# Altium PCB Port Deployable Solar Panel.PcbDoc (part 2 of 2)
Units mm, origin at the board's own origin, x right, y up, seen from the top; angles counter-clockwise.
Board outline 327.5 x 81 mm, 2 copper layers (Top Layer, Bottom Layer), stack 1.58 mm thick; 55 components, 32 nets, 178 pads, 1922 vias.
Unrouted connection lines stored in the file: 43.
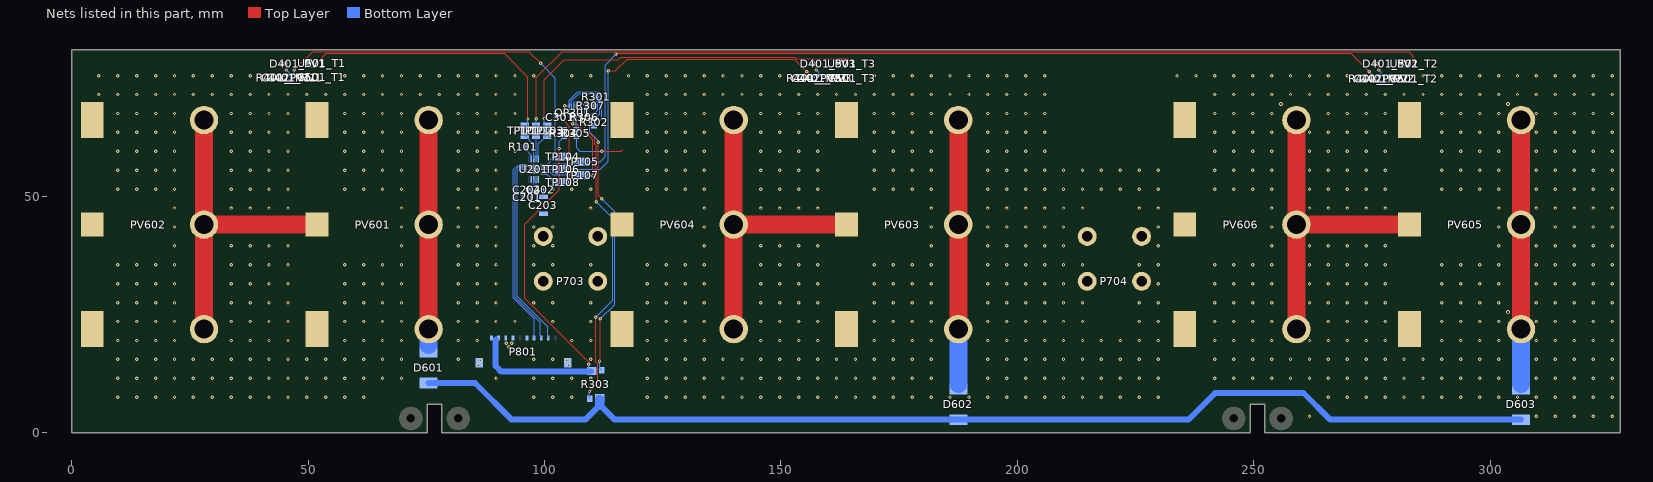
[diagram p2: the nets of this part, all layers, seen from the top]

## Via types
v1: diameter 0.711, hole 0.3, Top Layer to Bottom Layer, tented both sides, 1015 vias
v2: diameter 0.8, hole 0.5, Top Layer to Bottom Layer, 858 vias
v3: diameter 0.655, hole 0.25, Top Layer to Bottom Layer, 48 vias
v4: diameter 0.711, hole 0.3, Top Layer to Bottom Layer, 1 vias

## Nets (pads, with @x,y where several pads share a name; then routed paths per layer and width w, separated by ;. In a path a pad name is that pad's centre, name@x,y a point inside that pad or via, vN(x,y) a via of type N, cw(c..) or ccw(c..) an arc to the next point about the centre after c; other vN are vias at no path point) (continued)
GND: C201.1 C202.2 C203.2 C204.2 C301.1 C402_PV1.1 C402_PV2.1 C402_PV3.1 C501_T1.1 C501_T2.1 C501_T3.1 OP301.4 P703.1 P704.1 P801.5 P801.M1 P801.M2 pad.3 R307.2 R401_PV1.1 R401_PV2.1 R401_PV3.1 U201.6 U201.9 U201.21 U501_T1.A1 U501_T2.A1 U501_T3.A1
  other v1: 261.75,3.5 309.75,3.5 313.75,3.5 317.75,3.5 321.75,3.5 325.75,3.5 9.75,7.5 13.75,7.5 17.75,7.5 21.75,7.5 25.75,7.5 29.75,7.5 33.75,7.5 37.75,7.5 41.75,7.5 45.75,7.5 49.75,7.5 53.75,7.5 57.75,7.5 61.75,7.5 97.75,7.5 101.75,7.5 105.75,7.5 121.75,7.5 125.75,7.5 129.75,7.5 133.75,7.5 137.75,7.5 141.75,7.5 145.75,7.5 149.75,7.5 153.75,7.5 157.75,7.5 161.75,7.5 165.75,7.5 169.75,7.5 173.75,7.5 177.75,7.5 181.75,7.5 185.75,7.5 189.75,7.5 193.75,7.5 197.75,7.5 201.75,7.5 205.75,7.5 209.75,7.5 213.75,7.5 217.75,7.5 221.75,7.5 225.75,7.5 229.75,7.5 265.75,7.5 269.75,7.5 273.75,7.5 277.75,7.5 281.75,7.5 285.75,7.5 289.75,7.5 293.75,7.5 297.75,7.5 301.75,7.5 305.75,7.5 309.75,7.5 313.75,7.5 317.75,7.5 321.75,7.5 325.75,7.5 9.75,11.5 13.75,11.5 17.75,11.5 21.75,11.5 25.75,11.5 29.75,11.5 33.75,11.5 37.75,11.5 41.75,11.5 45.75,11.5 49.75,11.5 53.75,11.5 57.75,11.5 61.75,11.5 65.75,11.5 69.75,11.5 89.75,11.5 97.75,11.5 101.75,11.5 105.75,11.5 109.75,11.5 121.75,11.5 125.75,11.5 129.75,11.5 133.75,11.5 137.75,11.5 141.75,11.5 145.75,11.5 149.75,11.5 153.75,11.5 157.75,11.5 161.75,11.5 165.75,11.5 169.75,11.5 173.75,11.5 177.75,11.5 181.75,11.5 193.75,11.5 197.75,11.5 201.75,11.5 205.75,11.5 209.75,11.5 213.75,11.5 217.75,11.5 221.75,11.5 225.75,11.5 229.75,11.5 241.75,11.5 245.75,11.5 249.75,11.5 253.75,11.5 257.75,11.5 261.75,11.5 265.75,11.5 269.75,11.5 273.75,11.5 277.75,11.5 281.75,11.5 285.75,11.5 289.75,11.5 293.75,11.5 297.75,11.5 301.75,11.5 309.75,11.5 313.75,11.5 317.75,11.5 321.75,11.5 325.75,11.5 9.75,15.5 13.75,15.5 17.75,15.5 21.75,15.5 25.75,15.5 29.75,15.5 33.75,15.5 37.75,15.5 41.75,15.5 45.75,15.5 49.75,15.5 53.75,15.5 57.75,15.5 61.75,15.5 65.75,15.5 69.75,15.5 81.75,15.5 97.75,15.5 101.75,15.5 109.75,15.5 121.75,15.5 125.75,15.5 129.75,15.5 133.75,15.5 137.75,15.5 141.75,15.5 145.75,15.5 149.75,15.5 153.75,15.5 157.75,15.5 161.75,15.5 165.75,15.5 169.75,15.5 173.75,15.5 177.75,15.5 181.75,15.5 193.75,15.5 197.75,15.5 201.75,15.5 205.75,15.5 209.75,15.5 213.75,15.5 217.75,15.5 221.75,15.5 225.75,15.5 229.75,15.5 241.75,15.5 245.75,15.5 249.75,15.5 253.75,15.5 257.75,15.5 261.75,15.5 265.75,15.5 269.75,15.5 273.75,15.5 277.75,15.5 281.75,15.5 285.75,15.5 289.75,15.5 293.75,15.5 297.75,15.5 301.75,15.5 309.75,15.5 313.75,15.5 317.75,15.5 321.75,15.5 325.75,15.5 9.75,19.5 13.75,19.5 17.75,19.5 21.75,19.5 33.75,19.5 37.75,19.5 41.75,19.5 45.75,19.5 57.75,19.5 61.75,19.5 65.75,19.5 69.75,19.5 81.75,19.5 85.75,19.5 105.75,19.5 109.75,19.5 121.75,19.5 125.75,19.5 129.75,19.5 133.75,19.5 145.75,19.5 149.75,19.5 153.75,19.5 157.75,19.5 169.75,19.5 173.75,19.5 177.75,19.5 181.75,19.5 193.75,19.5 197.75,19.5 201.75,19.5 205.75,19.5 209.75,19.5 213.75,19.5 217.75,19.5 221.75,19.5 225.75,19.5 229.75,19.5 241.75,19.5 245.75,19.5 249.75,19.5 253.75,19.5 261.75,19.5 265.75,19.5 269.75,19.5 273.75,19.5 277.75,19.5 289.75,19.5 293.75,19.5 297.75,19.5 301.75,19.5 309.75,19.5 313.75,19.5 317.75,19.5 321.75,19.5 325.75,19.5 9.75,23.5 13.75,23.5 17.75,23.5 21.75,23.5 33.75,23.5 37.75,23.5 41.75,23.5 45.75,23.5 57.75,23.5 61.75,23.5 65.75,23.5 69.75,23.5 81.75,23.5 85.75,23.5 89.75,23.5 93.75,23.5 101.75,23.5 109.75,23.5 121.75,23.5 125.75,23.5 129.75,23.5 133.75,23.5 145.75,23.5 149.75,23.5 153.75,23.5 157.75,23.5 169.75,23.5 173.75,23.5 177.75,23.5 181.75,23.5 193.75,23.5 197.75,23.5 201.75,23.5 205.75,23.5 209.75,23.5 213.75,23.5 225.75,23.5 229.75,23.5 241.75,23.5 245.75,23.5 249.75,23.5 253.75,23.5 265.75,23.5 269.75,23.5 273.75,23.5 277.75,23.5 289.75,23.5 293.75,23.5 297.75,23.5 301.75,23.5 309.75,23.5 313.75,23.5 317.75,23.5 321.75,23.5 325.75,23.5 9.75,27.5 13.75,27.5 17.75,27.5 21.75,27.5 33.75,27.5 37.75,27.5 41.75,27.5 45.75,27.5 57.75,27.5 61.75,27.5 65.75,27.5 69.75,27.5 81.75,27.5 85.75,27.5 89.75,27.5 97.75,27.5 101.75,27.5 109.75,27.5 121.75,27.5 125.75,27.5 129.75,27.5 133.75,27.5 145.75,27.5 149.75,27.5 153.75,27.5 157.75,27.5 169.75,27.5 173.75,27.5 177.75,27.5 181.75,27.5 193.75,27.5 197.75,27.5 201.75,27.5 205.75,27.5 209.75,27.5 213.75,27.5 225.75,27.5 229.75,27.5 241.75,27.5 245.75,27.5 249.75,27.5 253.75,27.5 261.75,27.5 265.75,27.5 269.75,27.5 273.75,27.5 277.75,27.5 289.75,27.5 293.75,27.5 297.75,27.5 301.75,27.5 309.75,27.5 313.75,27.5 317.75,27.5 321.75,27.5 325.75,27.5 9.75,31.5 13.75,31.5 17.75,31.5 21.75,31.5 33.75,31.5 37.75,31.5 41.75,31.5 45.75,31.5 57.75,31.5 61.75,31.5 65.75,31.5 69.75,31.5 81.75,31.5 85.75,31.5 89.75,31.5 121.75,31.5 125.75,31.5 129.75,31.5 133.75,31.5 145.75,31.5 149.75,31.5 153.75,31.5 157.75,31.5 169.75,31.5 173.75,31.5 177.75,31.5 181.75,31.5 193.75,31.5 197.75,31.5 201.75,31.5 205.75,31.5 209.75,31.5 229.75,31.5 241.75,31.5 245.75,31.5 249.75,31.5 253.75,31.5 261.75,31.5 265.75,31.5 269.75,31.5 273.75,31.5 277.75,31.5 289.75,31.5 293.75,31.5 297.75,31.5 301.75,31.5 309.75,31.5 313.75,31.5 317.75,31.5 321.75,31.5 325.75,31.5 9.75,35.5 13.75,35.5 17.75,35.5 21.75,35.5 33.75,35.5 37.75,35.5 41.75,35.5 45.75,35.5 57.75,35.5 61.75,35.5 65.75,35.5 69.75,35.5 81.75,35.5 85.75,35.5 89.75,35.5 97.75,35.5 101.75,35.5 109.75,35.5 121.75,35.5 125.75,35.5 129.75,35.5 133.75,35.5 145.75,35.5 149.75,35.5 153.75,35.5 157.75,35.5 169.75,35.5 173.75,35.5 177.75,35.5 181.75,35.5 193.75,35.5 197.75,35.5 201.75,35.5 205.75,35.5 209.75,35.5 213.75,35.5 225.75,35.5 229.75,35.5 241.75,35.5 245.75,35.5 249.75,35.5 253.75,35.5 261.75,35.5 265.75,35.5 269.75,35.5 273.75,35.5 277.75,35.5 289.75,35.5 293.75,35.5 297.75,35.5 301.75,35.5 309.75,35.5 313.75,35.5 317.75,35.5 321.75,35.5 325.75,35.5 21.75,39.5 33.75,39.5 37.75,39.5 41.75,39.5 45.75,39.5 69.75,39.5 81.75,39.5 85.75,39.5 89.75,39.5 97.75,39.5 101.75,39.5 133.75,39.5 145.75,39.5 149.75,39.5 153.75,39.5 157.75,39.5 181.75,39.5 193.75,39.5 197.75,39.5 201.75,39.5 205.75,39.5 209.75,39.5 229.75,39.5 253.75,39.5 261.75,39.5 265.75,39.5 269.75,39.5 273.75,39.5 277.75,39.5 301.75,39.5 309.75,39.5 313.75,39.5 317.75,39.5 321.75,39.5 325.75,39.5 21.75,43.5 69.75,43.5 81.75,43.5 85.75,43.5 89.75,43.5 97.75,43.5 101.75,43.5 133.75,43.5 181.75,43.5 193.75,43.5 197.75,43.5 201.75,43.5 205.75,43.5 209.75,43.5 229.75,43.5 253.75,43.5 301.75,43.5 313.75,43.5 317.75,43.5 321.75,43.5 325.75,43.5 21.75,47.5 33.75,47.5 37.75,47.5 41.75,47.5 45.75,47.5 69.75,47.5 81.75,47.5 85.75,47.5 89.75,47.5 97.75,47.5 101.75,47.5 109.75,47.5 133.75,47.5 145.75,47.5 149.75,47.5 153.75,47.5 157.75,47.5 181.75,47.5 193.75,47.5 197.75,47.5 201.75,47.5 205.75,47.5 209.75,47.5 213.75,47.5 225.75,47.5 229.75,47.5 253.75,47.5 261.75,47.5 265.75,47.5 269.75,47.5 273.75,47.5 277.75,47.5 301.75,47.5 309.75,47.5 313.75,47.5 317.75,47.5 321.75,47.5 325.75,47.5 9.75,51.5 13.75,51.5 17.75,51.5 21.75,51.5 33.75,51.5 37.75,51.5 41.75,51.5 45.75,51.5 57.75,51.5 61.75,51.5 65.75,51.5 69.75,51.5 81.75,51.5 85.75,51.5 89.75,51.5 101.75,51.5 105.75,51.5 109.75,51.5 121.75,51.5 125.75,51.5 129.75,51.5 133.75,51.5 145.75,51.5 149.75,51.5 153.75,51.5 157.75,51.5 169.75,51.5 173.75,51.5 177.75,51.5 181.75,51.5 193.75,51.5 197.75,51.5 201.75,51.5 205.75,51.5 209.75,51.5 213.75,51.5 217.75,51.5 221.75,51.5 225.75,51.5 229.75,51.5 241.75,51.5 245.75,51.5 249.75,51.5 253.75,51.5 261.75,51.5 265.75,51.5 269.75,51.5 273.75,51.5 277.75,51.5 289.75,51.5 293.75,51.5 297.75,51.5 301.75,51.5 309.75,51.5 313.75,51.5 317.75,51.5 321.75,51.5 325.75,51.5 97.15,55.15 98.25,55.15 9.75,55.5 13.75,55.5 17.75,55.5 21.75,55.5 33.75,55.5 37.75,55.5 41.75,55.5 45.75,55.5 57.75,55.5 61.75,55.5 65.75,55.5 69.75,55.5 81.75,55.5 85.75,55.5 89.75,55.5 121.75,55.5 125.75,55.5 129.75,55.5 133.75,55.5 145.75,55.5 149.75,55.5 153.75,55.5 157.75,55.5 169.75,55.5 173.75,55.5 177.75,55.5 181.75,55.5 193.75,55.5 197.75,55.5 201.75,55.5 205.75,55.5 209.75,55.5 213.75,55.5 217.75,55.5 221.75,55.5 225.75,55.5 229.75,55.5 241.75,55.5 245.75,55.5 249.75,55.5 253.75,55.5 261.75,55.5 265.75,55.5 269.75,55.5 273.75,55.5 277.75,55.5 289.75,55.5 293.75,55.5 297.75,55.5 301.75,55.5 309.75,55.5 313.75,55.5 317.75,55.5 321.75,55.5 325.75,55.5 97.15,56.25 98.25,56.25 9.75,59.5 13.75,59.5 17.75,59.5 21.75,59.5 33.75,59.5 37.75,59.5 41.75,59.5 45.75,59.5 57.75,59.5 61.75,59.5 65.75,59.5 69.75,59.5 81.75,59.5 85.75,59.5 89.75,59.5 93.75,59.5 121.75,59.5 125.75,59.5 129.75,59.5 133.75,59.5 145.75,59.5 149.75,59.5 153.75,59.5 157.75,59.5 169.75,59.5 173.75,59.5 177.75,59.5 181.75,59.5 193.75,59.5 197.75,59.5 201.75,59.5 205.75,59.5 241.75,59.5 245.75,59.5 249.75,59.5 253.75,59.5 261.75,59.5 265.75,59.5 269.75,59.5 273.75,59.5 277.75,59.5 289.75,59.5 293.75,59.5 297.75,59.5 301.75,59.5 309.75,59.5 313.75,59.5 317.75,59.5 321.75,59.5 325.75,59.5 9.75,63.5 13.75,63.5 17.75,63.5 21.75,63.5 33.75,63.5 37.75,63.5 41.75,63.5 45.75,63.5 57.75,63.5 61.75,63.5 65.75,63.5 69.75,63.5 81.75,63.5 85.75,63.5 89.75,63.5 93.75,63.5 121.75,63.5 125.75,63.5 129.75,63.5 133.75,63.5 145.75,63.5 149.75,63.5 153.75,63.5 157.75,63.5 169.75,63.5 173.75,63.5 177.75,63.5 181.75,63.5 193.75,63.5 197.75,63.5 201.75,63.5 205.75,63.5 241.75,63.5 245.75,63.5 249.75,63.5 253.75,63.5 261.75,63.5 265.75,63.5 269.75,63.5 273.75,63.5 277.75,63.5 289.75,63.5 293.75,63.5 297.75,63.5 301.75,63.5 309.75,63.5 313.75,63.5 317.75,63.5 321.75,63.5 325.75,63.5 9.75,67.5 13.75,67.5 17.75,67.5 21.75,67.5 33.75,67.5 37.75,67.5 41.75,67.5 45.75,67.5 57.75,67.5 61.75,67.5 65.75,67.5 69.75,67.5 81.75,67.5 85.75,67.5 89.75,67.5 93.75,67.5 121.75,67.5 125.75,67.5 129.75,67.5 133.75,67.5 145.75,67.5 149.75,67.5 153.75,67.5 157.75,67.5 169.75,67.5 173.75,67.5 177.75,67.5 181.75,67.5 193.75,67.5 197.75,67.5 201.75,67.5 205.75,67.5 241.75,67.5 245.75,67.5 249.75,67.5 253.75,67.5 265.75,67.5 269.75,67.5 273.75,67.5 277.75,67.5 289.75,67.5 293.75,67.5 297.75,67.5 301.75,67.5 309.75,67.5 313.75,67.5 317.75,67.5 321.75,67.5 325.75,67.5 5.75,71.5 9.75,71.5 13.75,71.5 17.75,71.5 21.75,71.5 25.75,71.5 29.75,71.5 33.75,71.5 37.75,71.5 41.75,71.5 45.75,71.5 49.75,71.5 53.75,71.5 57.75,71.5 61.75,71.5 65.75,71.5 69.75,71.5 73.75,71.5 77.75,71.5 81.75,71.5 85.75,71.5 89.75,71.5 93.75,71.5 121.75,71.5 125.75,71.5 129.75,71.5 133.75,71.5 137.75,71.5 141.75,71.5 145.75,71.5 149.75,71.5 153.75,71.5 157.75,71.5 161.75,71.5 165.75,71.5 169.75,71.5 173.75,71.5 177.75,71.5 181.75,71.5 185.75,71.5 189.75,71.5 193.75,71.5 197.75,71.5 201.75,71.5 205.75,71.5 241.75,71.5 245.75,71.5 249.75,71.5 253.75,71.5 257.75,71.5 261.75,71.5 265.75,71.5 269.75,71.5 273.75,71.5 277.75,71.5 281.75,71.5 285.75,71.5 289.75,71.5 293.75,71.5 297.75,71.5 301.75,71.5 305.75,71.5 309.75,71.5 313.75,71.5 317.75,71.5 321.75,71.5 325.75,71.5 5.75,75.5 9.75,75.5 13.75,75.5 17.75,75.5 21.75,75.5 25.75,75.5 29.75,75.5 33.75,75.5 37.75,75.5 41.75,75.5 49.75,75.5 57.75,75.5 61.75,75.5 65.75,75.5 69.75,75.5 73.75,75.5 77.75,75.5 81.75,75.5 85.75,75.5 89.75,75.5 93.75,75.5 97.75,75.5 105.75,75.5 109.75,75.5 117.75,75.5 121.75,75.5 125.75,75.5 129.75,75.5 133.75,75.5 137.75,75.5 141.75,75.5 145.75,75.5 149.75,75.5 153.75,75.5 161.75,75.5 169.75,75.5 173.75,75.5 177.75,75.5 181.75,75.5 185.75,75.5 189.75,75.5 193.75,75.5 197.75,75.5 201.75,75.5 205.75,75.5 233.75,75.5 237.75,75.5 241.75,75.5 245.75,75.5 249.75,75.5 253.75,75.5 257.75,75.5 261.75,75.5 265.75,75.5 269.75,75.5 281.75,75.5 285.75,75.5 289.75,75.5 293.75,75.5 297.75,75.5 301.75,75.5 305.75,75.5 309.75,75.5 313.75,75.5 317.75,75.5 321.75,75.5 325.75,75.5
  other v2: 303.75,25.5 255.75,69.5 303.75,69.5
NetC201_2: C201.2 U201.8 | length 4
  Bottom Layer w0.254: C201.2@97.2,49.75 97.2,49.95 97.7,50.45 U201.8@97.7,53.5
NetC202_1: C202.1 C203.1 U201.7 | length 4.6
  Bottom Layer w0.254: U201.7@98.2,53.5 98.2,51.9 98.6,51.5 C202.1@98.6,51.4 98.6,51.3 98.927,50.973 98.927,50.198 99.275,49.85 C203.1@99.75,49.85
NetD601_1: D601.1 PV601.1 | length 47.6
  Top Layer w3.81: PV601.1@75.5,22.139 75.5,40 75.5,62.111 PV601.1@75.5,66.361
  Bottom Layer w3.81: 75.5,18.5 PV601.1@75.5,21.889
NetD602_1: D602.1 PV603.1 | length 55.9
  Top Layer w3.81: PV603.1@187.5,22.139 PV603.1@187.5,66.111 PV603.1@187.5,66.361
  Bottom Layer w3.81: D602.1@187.5,10.25 PV603.1@187.5,21.889
NetD603_1: D603.1 PV605.1 | length 55.9
  Top Layer w3.81: PV605.1@306.5,22.139 PV605.1@306.5,44 PV605.1@306.5,66.111 PV605.1@306.5,66.361
  Bottom Layer w3.81: D603.1@306.5,10.25 PV605.1@306.5,21.889
NetOP301_2: OP301.2 R301.2 R302.1 | length 13.3
  Bottom Layer w0.254: OP301.2@105.7,68.945 105.702,68.947 105.702,70.196 107.206,71.7 110.818,71.7 111.203,71.315 111.203,71.123 R301.2@111.326,71 ; R302.1@110.476,66.35 110.601,66.35 111.686,67.435 111.686,70.112 111.28,70.518 111.28,70.954 R301.2@111.326,71 ; R301.2@111.35,71 R301.2@111.326,71
NetOP301_3: OP301.3 R306.2 R307.1 | length 5.7
  Bottom Layer w0.254: OP301.3@106.2,68.945 106.202,68.947 106.202,69.803 106.399,70 107.675,70 108.55,69.125 108.55,68.9 R306.2@108.55,67.026
NetOP301_5: OP301.5 R304.2 R305.2 | length 2.4
  Bottom Layer w0.254: R305.2@106.7,64.1 OP301.5@106.7,66.455
NetPV601_2: PV601.2 PV602.1 | length 68.1
  Top Layer w3.81: PV602.1@28,21.889 PV602.1@28,44 ; PV602.1@28,66.111 PV602.1@28,44 ; PV601.2@51.878,44 PV602.1@28,44
NetPV603_2: PV603.2 PV604.1 | length 112.3
  Top Layer w3.81: PV604.1@140,21.889 PV604.1@140,44 ; PV604.1@140,22.139 140,44.25 PV604.1@140,66.361 ; PV604.1@140,66.111 PV604.1@140,44 ; PV603.2@163.878,44 PV604.1@140,44
NetPV605_2: PV605.2 PV606.1 | length 68.1
  Top Layer w3.81: PV606.1@259,21.889 PV606.1@259,44 ; PV606.1@259,66.111 PV606.1@259,44 ; PV605.2@282.878,44 PV606.1@259,44
NetR101_1: R101.1 U201.17 | length 3
  Bottom Layer w0.254: R101.1@96.198,60.5 96.198,59.697 96.715,59.18 97.177,58.718 97.177,57.923 U201.17@97.2,57.9
NetR301_1: R301.1 R303.3 | length 62.7
  Top Layer w0.254: v1(111.35,61.4) 111.35,50.22 v1(112.07,49.5) ; v1(111.627,15.1) 111.8,15.273 v1(111.8,24.1)
  Bottom Layer w0.254: R301.1@110.598,71 110.623,71 110.746,70.877 110.746,70.373 111.279,69.839 111.279,68.295 110.684,67.7 110.215,67.7 109.571,67.056 109.571,63.529 111.35,61.75 v1(111.35,61.4) ; v1(111.627,15.1) 111.627,13.642 R303.3@112.07,13.199 ; v1(111.8,24.1) 114.8,27.1 114.8,46.77 v1(112.07,49.5)
NetR303_4: R303.4 R306.1 | length 63.9
  Top Layer w0.254: v1(108.55,65.1) 108.55,64.3 110.606,62.244 110.606,60.987 110.944,60.65 v1(110.944,48.8) ; v1(109.5,8.7) 111.3,10.5 111.3,14.529 110.8,15.029 v1(110.8,24.4)
  Bottom Layer w0.254: v1(108.55,65.1) R306.1@108.55,66.274 ; v1(109.5,8.7) 109.5,7.231 R303.4@109.53,7.201 ; v1(110.8,24.4) 114.394,27.994 114.394,45.35 v1(110.944,48.8)
NetU201_12: U201.12
SPI_CLK: P801.4 U201.15 | length 40
  Bottom Layer w0.254: U201.15@95.5,56.7 95.498,56.698 94.498,56.698 93.381,55.581 93.381,28.52 97.8,24.101 P801.4@97.8,20
SPI_MISO: P801.3 U201.14 | length 39.7
  Bottom Layer w0.254: U201.14@95.5,56.2 95.498,56.198 94.573,56.198 93.787,55.412 93.787,28.688 99.127,23.348 99.127,20.373 99.3,20.2 P801.3@99.3,20
SPI_MOSI: P801.2 U201.13 | length 39.4
  Bottom Layer w0.254: U201.13@95.5,55.7 95.498,55.698 94.698,55.698 94.194,55.194 94.194,28.856 100.65,22.4 100.65,20.15 P801.2@100.8,20
V+: D601.2 D602.2 D603.2 R303.1 | length 244.6
  Bottom Layer w1.27: D601.2@75.5,10.5 85.3,10.5 93.05,2.75 108.6,2.75 111.265,5.415 111.265,7.155 111.455,7.345 R303.1@111.635,7.345 111.815,7.345 112.005,7.155 112.005,5.595 114.85,2.75 D602.2@187.5,2.75 236.18,2.75 241.83,8.4 260.5,8.4 266.15,2.75 D603.2@306.5,2.75
V-: P801.7 P801.8 PV602.2 PV604.2 PV606.2 R305.1 | length 12.6
  Top Layer w0.254: v1(112.07,59.55) 116.2,59.55 116.55,59.9
  Bottom Layer w0.254: R305.1@106.7,62.6 106.85,62.45 106.85,60.2 107.5,59.55 v1(112.07,59.55)
  other v1: 92.45,18.15 91.9,18.9 93.05,18.9
V_out: P801.9 P801.10 R303.2 R304.1 | length 85.3
  Top Layer w0.254: v1(103.1,60.1) 103.1,51.35 95.825,44.075 95.825,28.425 109.35,14.9 v1(109.35,14.45)
  Bottom Layer w0.254: v1(103.1,60.1) 103.1,61.6 103.602,62.102 103.602,62.227 103.975,62.6 R304.1@104.1,62.6 ; v1(109.35,14.45) 109.35,13.36 R303.2@109.81,12.9
  Bottom Layer w1.27: 89.7,19.7 89.65,19.65 89.65,14.1 90.85,12.9 R303.2@109.81,12.9
VIN0: TP101.1 U201.18 U501_T1.B1 | length 65.3
  Top Layer w0.203: U501_T1.B1@52.7,78.35 52.7,79.094 53.819,80.213 91.5,80.213 96.5,75.213 v1(96.5,66.326)
  Bottom Layer w0.254: TP101.1@95.775,62.854 97.7,60.929 U201.18@97.7,57.9 ; TP101.1@95.8,63 TP101.1@95.8,63.826 96.5,64.526 v1(96.5,66.326)
VIN1: TP102.1 U201.19 U501_T2.B1 | length 205.5
  Top Layer w0.203: v1(98.25,66.376) 98.25,75.113 103.737,80.6 115.075,80.6 ; 115.076,80.6 115.698,80.6 282.8,80.6 283.75,79.65 U501_T2.B1@283.75,78.25
  Bottom Layer w0.254: U201.19@98.2,57.9 TP102.1@98.2,62.5 ; TP102.1@98.2,63.826 98.25,63.876 v1(98.25,66.376)
VIN2: TP103.1 U201.20 U501_T3.B1 | length 85
  Top Layer w0.203: v1(99.9,66.426) 99.9,74.6 104.15,78.85 115.6,78.85 116.1,79.35 152.939,79.35 153.189,79.1 162.016,79.1 162.07,79.154 163.73,79.154 163.784,79.1 164.4,79.1 164.4,78.65 U501_T3.B1@164.8,78.25
  Bottom Layer w0.203: v1(99.9,66.426) 99.9,64.525 TP103.1@100.6,63.826
  Bottom Layer w0.254: U201.20@98.7,57.9 98.7,61.052 99.838,62.19 99.838,62.212 100.29,62.664 TP103.1@100.312,62.664 ; TP103.1@100.6,63 TP103.1@100.6,63.826
VIN3: C401_PV1.1 C402_PV1.2 D401_PV1.1 R401_PV1.2 TP104.1 U201.1 | length 87.5
  Top Layer w0.254: D401_PV1.1@44.9,78 45.027,78 45.4,77.627 v1(45.4,76.7) ; v1(47.1,76.7) 50.994,80.594 96.706,80.594 v1(99.2,78.1)
  Bottom Layer w0.254: R401_PV1.2@44.85,75.326 44.962,75.438 45.888,75.438 C402_PV1.2@46,75.55 ; v1(45.4,76.7) 45.921,76.179 45.921,75.629 C402_PV1.2@46,75.55 ; v1(47.1,76.7) 47.125,76.675 47.125,75.575 47.15,75.55 C402_PV1.2@46,75.55 ; v1(99.2,78.1) 102.312,74.988 102.312,59.162 TP104.1@103.074,58.4 ; U201.1@99.9,56.7 100.521,56.7 101.164,57.343 101.164,57.759 101.804,58.4 TP104.1@103.074,58.4 ; TP104.1@103.9,58.4 TP104.1@103.074,58.4
VIN4: C401_PV2.1 C402_PV2.2 D401_PV2.1 R401_PV2.2 TP105.1 U201.2 | length 204.8
  Top Layer w0.254: v1(115.1,79.991) 115.1,80 115.319,80.219 270.481,80.219 v1(274.4,76.3) ; D401_PV2.1@275.95,78 276.027,78 276.4,77.627 v1(276.4,76.7)
  Bottom Layer w0.254: U201.2@99.9,56.2 101.2,56.2 101.868,56.868 107.468,56.868 TP105.1@107.9,57.3 111.75,57.3 112.815,58.365 112.815,77.715 115.091,79.991 v1(115.1,79.991) ; v1(274.4,76.3) 275.319,75.381 275.845,75.381 275.95,75.276 276.062,75.388 276.988,75.388 C402_PV2.2@277.1,75.5 ; v1(276.4,76.7) 276.921,76.179 276.921,75.633 277.054,75.5 C402_PV2.2@277.1,75.5 ; C401_PV2.1@278.25,75.5 C402_PV2.2@277.1,75.5
VIN5: C401_PV3.1 C402_PV3.2 D401_PV3.1 R401_PV3.2 TP106.1 U201.3 | length 85.2
  Top Layer w0.254: v1(113.45,76.5) 115,76.5 117.469,78.969 152.781,78.969 v1(155.45,76.3) ; D401_PV3.1@157,78 157.077,78 157.45,77.627 v1(157.45,76.7)
  Bottom Layer w0.254: U201.3@99.9,55.7 TP106.1@103.9,55.7 111.75,55.7 113.45,57.4 v1(113.45,76.5) v1@113.221,76.271 ; v1(155.45,76.3) 156.369,75.381 156.895,75.381 R401_PV3.2@157,75.276 157.112,75.388 158.038,75.388 C402_PV3.2@158.15,75.5 ; v1(157.45,76.7) 157.971,76.179 157.971,75.633 158.104,75.5 C402_PV3.2@158.15,75.5 ; C401_PV3.1@159.3,75.5 C402_PV3.2@158.15,75.5
VIN6: OP301.6 OP301.7 TP107.1 U201.4 | length 23.9
  Top Layer w0.254: v1(105.95,65.3) 106.85,65.3 110.2,61.95 v1(110.2,54.35)
  Bottom Layer w0.254: U201.4@99.9,55.2 101.101,55.2 101.77,54.532 107.768,54.532 TP107.1@107.9,54.4 107.95,54.35 v1(110.2,54.35)
VIN7: OP301.1 R302.2 TP108.1 U201.5 | length 38.6
  Top Layer w0.254: v1(104.25,69.1) 104.25,65.7 105.25,64.7 v1(105.25,53.25)
  Bottom Layer w0.254: U201.5@99.9,54.7 100.521,54.7 101.164,54.057 101.164,53.641 101.804,53 TP108.1@103.9,53 ; v1(104.25,69.1) 105.198,69.1 OP301.1@105.2,69.098 ; OP301.1@105.2,68.945 105.202,68.947 105.202,69.1 105.202,70.303 107.006,72.106 111.163,72.106 112.092,71.177 112.092,66.341 110.601,64.85 R302.2@110.476,64.85
pads on no net: OP301.9 P701.1 P702.1
copper on no net:
  other v1: 109.3,70.8
  other v2: 7.75,13.5 11.75,13.5 15.75,13.5 19.75,13.5 23.75,13.5 27.75,13.5 31.75,13.5 35.75,13.5 39.75,13.5 55.75,13.5 59.75,13.5 63.75,13.5 67.75,13.5 71.75,13.5 75.75,13.5 79.75,13.5 83.75,13.5 87.75,13.5 119.75,13.5 123.75,13.5 127.75,13.5 131.75,13.5 135.75,13.5 139.75,13.5 143.75,13.5 147.75,13.5 151.75,13.5 167.75,13.5 171.75,13.5 175.75,13.5 179.75,13.5 183.75,13.5 191.75,13.5 195.75,13.5 199.75,13.5 239.75,13.5 243.75,13.5 247.75,13.5 251.75,13.5 255.75,13.5 259.75,13.5 263.75,13.5 267.75,13.5 271.75,13.5 287.75,13.5 291.75,13.5 295.75,13.5 299.75,13.5 303.75,13.5 311.75,13.5 315.75,13.5 319.75,13.5 7.75,17.5 11.75,17.5 15.75,17.5 19.75,17.5 23.75,17.5 27.75,17.5 31.75,17.5 35.75,17.5 39.75,17.5 43.75,17.5 55.75,17.5 59.75,17.5 63.75,17.5 67.75,17.5 71.75,17.5 79.75,17.5 83.75,17.5 87.75,17.5 119.75,17.5 123.75,17.5 127.75,17.5 131.75,17.5 135.75,17.5 139.75,17.5 143.75,17.5 147.75,17.5 151.75,17.5 155.75,17.5 167.75,17.5 171.75,17.5 175.75,17.5 179.75,17.5 183.75,17.5 191.75,17.5 195.75,17.5 199.75,17.5 203.75,17.5 239.75,17.5 243.75,17.5 247.75,17.5 251.75,17.5 255.75,17.5 259.75,17.5 263.75,17.5 267.75,17.5 271.75,17.5 275.75,17.5 287.75,17.5 291.75,17.5 295.75,17.5 299.75,17.5 303.75,17.5 311.75,17.5 315.75,17.5 319.75,17.5 323.75,17.5 7.75,21.5 11.75,21.5 15.75,21.5 19.75,21.5 23.75,21.5 31.75,21.5 35.75,21.5 39.75,21.5 43.75,21.5 47.75,21.5 55.75,21.5 59.75,21.5 63.75,21.5 67.75,21.5 71.75,21.5 79.75,21.5 83.75,21.5 87.75,21.5 91.75,21.5 119.75,21.5 123.75,21.5 127.75,21.5 131.75,21.5 135.75,21.5 143.75,21.5 147.75,21.5 151.75,21.5 155.75,21.5 159.75,21.5 167.75,21.5 171.75,21.5 175.75,21.5 179.75,21.5 183.75,21.5 191.75,21.5 195.75,21.5 199.75,21.5 203.75,21.5 239.75,21.5 243.75,21.5 247.75,21.5 251.75,21.5 263.75,21.5 267.75,21.5 271.75,21.5 275.75,21.5 287.75,21.5 291.75,21.5 295.75,21.5 299.75,21.5 311.75,21.5 315.75,21.5 319.75,21.5 323.75,21.5 7.75,25.5 11.75,25.5 15.75,25.5 19.75,25.5 23.75,25.5 31.75,25.5 35.75,25.5 39.75,25.5 43.75,25.5 47.75,25.5 55.75,25.5 59.75,25.5 63.75,25.5 67.75,25.5 71.75,25.5 79.75,25.5 83.75,25.5 87.75,25.5 91.75,25.5 119.75,25.5 123.75,25.5 127.75,25.5 131.75,25.5 135.75,25.5 143.75,25.5 147.75,25.5 151.75,25.5 155.75,25.5 159.75,25.5 167.75,25.5 171.75,25.5 175.75,25.5 179.75,25.5 183.75,25.5 191.75,25.5 195.75,25.5 199.75,25.5 203.75,25.5 239.75,25.5 243.75,25.5 247.75,25.5 251.75,25.5 263.75,25.5 267.75,25.5 271.75,25.5 275.75,25.5 287.75,25.5 291.75,25.5 295.75,25.5 299.75,25.5 311.75,25.5 315.75,25.5 319.75,25.5 323.75,25.5 7.75,29.5 11.75,29.5 15.75,29.5 19.75,29.5 23.75,29.5 31.75,29.5 35.75,29.5 39.75,29.5 43.75,29.5 47.75,29.5 55.75,29.5 59.75,29.5 63.75,29.5 67.75,29.5 71.75,29.5 79.75,29.5 83.75,29.5 87.75,29.5 91.75,29.5 119.75,29.5 123.75,29.5 127.75,29.5 131.75,29.5 135.75,29.5 143.75,29.5 147.75,29.5 151.75,29.5 155.75,29.5 159.75,29.5 167.75,29.5 171.75,29.5 175.75,29.5 179.75,29.5 183.75,29.5 191.75,29.5 195.75,29.5 199.75,29.5 203.75,29.5 239.75,29.5 243.75,29.5 247.75,29.5 251.75,29.5 255.75,29.5 263.75,29.5 267.75,29.5 271.75,29.5 275.75,29.5 287.75,29.5 291.75,29.5 295.75,29.5 299.75,29.5 303.75,29.5 311.75,29.5 315.75,29.5 319.75,29.5 323.75,29.5 7.75,33.5 11.75,33.5 15.75,33.5 19.75,33.5 23.75,33.5 31.75,33.5 35.75,33.5 39.75,33.5 43.75,33.5 47.75,33.5 55.75,33.5 59.75,33.5 63.75,33.5 67.75,33.5 71.75,33.5 79.75,33.5 83.75,33.5 87.75,33.5 91.75,33.5 119.75,33.5 123.75,33.5 127.75,33.5 131.75,33.5 135.75,33.5 143.75,33.5 147.75,33.5 151.75,33.5 155.75,33.5 159.75,33.5 167.75,33.5 171.75,33.5 175.75,33.5 179.75,33.5 183.75,33.5 191.75,33.5 195.75,33.5 199.75,33.5 203.75,33.5 239.75,33.5 243.75,33.5 247.75,33.5 251.75,33.5 255.75,33.5 263.75,33.5 267.75,33.5 271.75,33.5 275.75,33.5 287.75,33.5 291.75,33.5 295.75,33.5 299.75,33.5 303.75,33.5 311.75,33.5 315.75,33.5 319.75,33.5 323.75,33.5 7.75,37.5 11.75,37.5 15.75,37.5 19.75,37.5 23.75,37.5 31.75,37.5 35.75,37.5 39.75,37.5 43.75,37.5 47.75,37.5 55.75,37.5 59.75,37.5 63.75,37.5 67.75,37.5 71.75,37.5 79.75,37.5 83.75,37.5 87.75,37.5 91.75,37.5 119.75,37.5 123.75,37.5 127.75,37.5 131.75,37.5 135.75,37.5 143.75,37.5 147.75,37.5 151.75,37.5 155.75,37.5 159.75,37.5 167.75,37.5 171.75,37.5 175.75,37.5 179.75,37.5 183.75,37.5 191.75,37.5 195.75,37.5 199.75,37.5 203.75,37.5 239.75,37.5 243.75,37.5 247.75,37.5 251.75,37.5 255.75,37.5 263.75,37.5 267.75,37.5 271.75,37.5 275.75,37.5 287.75,37.5 291.75,37.5 295.75,37.5 299.75,37.5 303.75,37.5 311.75,37.5 315.75,37.5 319.75,37.5 323.75,37.5 23.75,41.5 31.75,41.5 35.75,41.5 39.75,41.5 43.75,41.5 71.75,41.5 79.75,41.5 83.75,41.5 87.75,41.5 91.75,41.5 135.75,41.5 143.75,41.5 147.75,41.5 151.75,41.5 155.75,41.5 183.75,41.5 191.75,41.5 195.75,41.5 199.75,41.5 203.75,41.5 251.75,41.5 255.75,41.5 263.75,41.5 267.75,41.5 271.75,41.5 275.75,41.5 299.75,41.5 311.75,41.5 315.75,41.5 319.75,41.5 323.75,41.5 23.75,45.5 71.75,45.5 79.75,45.5 83.75,45.5 87.75,45.5 91.75,45.5 135.75,45.5 183.75,45.5 191.75,45.5 195.75,45.5 199.75,45.5 203.75,45.5 251.75,45.5 299.75,45.5 311.75,45.5 315.75,45.5 319.75,45.5 323.75,45.5 23.75,49.5 31.75,49.5 35.75,49.5 39.75,49.5 43.75,49.5 47.75,49.5 71.75,49.5 79.75,49.5 83.75,49.5 87.75,49.5 91.75,49.5 135.75,49.5 143.75,49.5 147.75,49.5 151.75,49.5 155.75,49.5 159.75,49.5 183.75,49.5 191.75,49.5 195.75,49.5 199.75,49.5 203.75,49.5 251.75,49.5 255.75,49.5 263.75,49.5 267.75,49.5 271.75,49.5 275.75,49.5 299.75,49.5 303.75,49.5 311.75,49.5 315.75,49.5 319.75,49.5 323.75,49.5 7.75,53.5 11.75,53.5 15.75,53.5 19.75,53.5 23.75,53.5 31.75,53.5 35.75,53.5 39.75,53.5 43.75,53.5 47.75,53.5 55.75,53.5 59.75,53.5 63.75,53.5 67.75,53.5 71.75,53.5 79.75,53.5 83.75,53.5 87.75,53.5 91.75,53.5 119.75,53.5 123.75,53.5 127.75,53.5 131.75,53.5 135.75,53.5 143.75,53.5 147.75,53.5 151.75,53.5 155.75,53.5 159.75,53.5 167.75,53.5 171.75,53.5 175.75,53.5 179.75,53.5 183.75,53.5 191.75,53.5 195.75,53.5 199.75,53.5 203.75,53.5 239.75,53.5 243.75,53.5 247.75,53.5 251.75,53.5 255.75,53.5 263.75,53.5 267.75,53.5 271.75,53.5 275.75,53.5 287.75,53.5 291.75,53.5 295.75,53.5 299.75,53.5 303.75,53.5 311.75,53.5 315.75,53.5 319.75,53.5 323.75,53.5 7.75,57.5 11.75,57.5 15.75,57.5 19.75,57.5 23.75,57.5 31.75,57.5 35.75,57.5 39.75,57.5 43.75,57.5 47.75,57.5 55.75,57.5 59.75,57.5 63.75,57.5 67.75,57.5 71.75,57.5 79.75,57.5 83.75,57.5 87.75,57.5 91.75,57.5 119.75,57.5 123.75,57.5 127.75,57.5 131.75,57.5 135.75,57.5 143.75,57.5 147.75,57.5 151.75,57.5 155.75,57.5 159.75,57.5 167.75,57.5 171.75,57.5 175.75,57.5 179.75,57.5 183.75,57.5 191.75,57.5 195.75,57.5 199.75,57.5 203.75,57.5 239.75,57.5 243.75,57.5 247.75,57.5 251.75,57.5 255.75,57.5 263.75,57.5 267.75,57.5 271.75,57.5 275.75,57.5 287.75,57.5 291.75,57.5 295.75,57.5 299.75,57.5 303.75,57.5 311.75,57.5 315.75,57.5 319.75,57.5 323.75,57.5 7.75,61.5 11.75,61.5 15.75,61.5 19.75,61.5 23.75,61.5 31.75,61.5 35.75,61.5 39.75,61.5 43.75,61.5 47.75,61.5 55.75,61.5 59.75,61.5 63.75,61.5 67.75,61.5 71.75,61.5 79.75,61.5 83.75,61.5 87.75,61.5 91.75,61.5 119.75,61.5 123.75,61.5 127.75,61.5 131.75,61.5 135.75,61.5 143.75,61.5 147.75,61.5 151.75,61.5 155.75,61.5 159.75,61.5 167.75,61.5 171.75,61.5 175.75,61.5 179.75,61.5 183.75,61.5 191.75,61.5 195.75,61.5 199.75,61.5 203.75,61.5 239.75,61.5 243.75,61.5 247.75,61.5 251.75,61.5 255.75,61.5 263.75,61.5 267.75,61.5 271.75,61.5 275.75,61.5 287.75,61.5 291.75,61.5 295.75,61.5 299.75,61.5 303.75,61.5 311.75,61.5 315.75,61.5 319.75,61.5 323.75,61.5 7.75,65.5 11.75,65.5 15.75,65.5 19.75,65.5 23.75,65.5 31.75,65.5 35.75,65.5 39.75,65.5 43.75,65.5 47.75,65.5 55.75,65.5 59.75,65.5 63.75,65.5 67.75,65.5 71.75,65.5 79.75,65.5 83.75,65.5 87.75,65.5 91.75,65.5 119.75,65.5 123.75,65.5 127.75,65.5 131.75,65.5 135.75,65.5 143.75,65.5 147.75,65.5 151.75,65.5 155.75,65.5 159.75,65.5 167.75,65.5 171.75,65.5 175.75,65.5 179.75,65.5 183.75,65.5 191.75,65.5 195.75,65.5 199.75,65.5 203.75,65.5 239.75,65.5 243.75,65.5 247.75,65.5 251.75,65.5 263.75,65.5 267.75,65.5 271.75,65.5 275.75,65.5 287.75,65.5 291.75,65.5 295.75,65.5 299.75,65.5 311.75,65.5 315.75,65.5 319.75,65.5 323.75,65.5 7.75,69.5 11.75,69.5 15.75,69.5 19.75,69.5 23.75,69.5 31.75,69.5 35.75,69.5 39.75,69.5 43.75,69.5 47.75,69.5 55.75,69.5 59.75,69.5 63.75,69.5 67.75,69.5 71.75,69.5 79.75,69.5 83.75,69.5 87.75,69.5 91.75,69.5 119.75,69.5 123.75,69.5 127.75,69.5 131.75,69.5 135.75,69.5 143.75,69.5 147.75,69.5 151.75,69.5 155.75,69.5 159.75,69.5 167.75,69.5 171.75,69.5 175.75,69.5 179.75,69.5 183.75,69.5 191.75,69.5 195.75,69.5 199.75,69.5 203.75,69.5 239.75,69.5 243.75,69.5 247.75,69.5 251.75,69.5 263.75,69.5 267.75,69.5 271.75,69.5 275.75,69.5 287.75,69.5 291.75,69.5 295.75,69.5 299.75,69.5 311.75,69.5 315.75,69.5 319.75,69.5 323.75,69.5 7.75,73.5 11.75,73.5 15.75,73.5 19.75,73.5 23.75,73.5 27.75,73.5 31.75,73.5 35.75,73.5 39.75,73.5 43.75,73.5 55.75,73.5 59.75,73.5 63.75,73.5 67.75,73.5 71.75,73.5 75.75,73.5 79.75,73.5 83.75,73.5 87.75,73.5 91.75,73.5 119.75,73.5 123.75,73.5 127.75,73.5 131.75,73.5 135.75,73.5 139.75,73.5 143.75,73.5 147.75,73.5 151.75,73.5 155.75,73.5 167.75,73.5 171.75,73.5 175.75,73.5 179.75,73.5 183.75,73.5 187.75,73.5 191.75,73.5 195.75,73.5 199.75,73.5 203.75,73.5 239.75,73.5 243.75,73.5 247.75,73.5 251.75,73.5 255.75,73.5 259.75,73.5 263.75,73.5 267.75,73.5 271.75,73.5 287.75,73.5 291.75,73.5 295.75,73.5 299.75,73.5 303.75,73.5 307.75,73.5 311.75,73.5 315.75,73.5 319.75,73.5 323.75,73.5 7.75,77.5 11.75,77.5 15.75,77.5 19.75,77.5 23.75,77.5 27.75,77.5 31.75,77.5 35.75,77.5 39.75,77.5 55.75,77.5 59.75,77.5 63.75,77.5 67.75,77.5 71.75,77.5 75.75,77.5 79.75,77.5 83.75,77.5 87.75,77.5 119.75,77.5 123.75,77.5 127.75,77.5 131.75,77.5 135.75,77.5 139.75,77.5 143.75,77.5 147.75,77.5 151.75,77.5 167.75,77.5 171.75,77.5 175.75,77.5 179.75,77.5 183.75,77.5 187.75,77.5 191.75,77.5 195.75,77.5 199.75,77.5 239.75,77.5 243.75,77.5 247.75,77.5 251.75,77.5 255.75,77.5 259.75,77.5 263.75,77.5 267.75,77.5 287.75,77.5 291.75,77.5 295.75,77.5 299.75,77.5 303.75,77.5 307.75,77.5 311.75,77.5 315.75,77.5 319.75,77.5
  other v3: 71.115,0.968 72.385,0.968 81.115,0.968 82.385,0.968 245.115,0.968 246.385,0.968 255.115,0.968 256.385,0.968 70.48,1.73 73.02,1.73 80.48,1.73 83.02,1.73 244.48,1.73 247.02,1.73 254.48,1.73 257.02,1.73 69.718,2.365 73.655,2.365 79.718,2.365 83.655,2.365 243.718,2.365 247.655,2.365 253.718,2.365 257.655,2.365 69.718,3.635 73.782,3.635 79.718,3.635 83.782,3.635 243.718,3.635 247.782,3.635 253.718,3.635 257.782,3.635 70.48,4.27 73.02,4.27 80.48,4.27 83.02,4.27 244.48,4.27 247.02,4.27 254.48,4.27 257.02,4.27 71.115,5.032 72.385,5.032 81.115,5.032 82.385,5.032 245.115,5.032 246.385,5.032 255.115,5.032 256.385,5.032

## Polygon pours and split planes (outlines as drawn)
GND on Top Layer "Top Layer-GND" (solid, pour order 18): 0,0 0,85.35 327.75,85.35 328.8,84.3 328.8,0
V- on Top Layer "Top Layer-VStarD-" (solid, remove dead copper, pour order 14): 89.25,8 91.316,8 95.544,3.635 110.8,3.635 114.1,7 118.8,7 122.165,3.635 230.035,3.635 233.2,6.8 237.99,6.8 237.99,0 0,0 0,4.2 2.1,6.3 6.835,6.3 9.5,3.635 60.003,3.635 66.368,10 87.25,10
GND on Bottom Layer "Bottom Layer-GND 1" (solid, pour order 16): 0,0 0,85.35 327.75,85.35 328.8,84.3 328.8,0

## Keep-outs
Keep-Out Layer:
  lines w0.254: 0,0 75.25,0 75.25,6 78.25,6 78.25,0 249.25,0 249.25,6 252.25,6 252.25,0 327.5,0 327.5,81 0,81 0,0 ; 7.55,38.5 19.75,38.5 19.75,49.5 7.55,49.5 7.55,38.5 ; 55.05,38.5 67.25,38.5 67.25,49.5 55.05,49.5 55.05,38.5 ; 102.5,22.5 102.5,49.5 108.5,49.5 108.5,22.5 102.5,22.5 ; 119.55,38.5 131.75,38.5 131.75,49.5 119.55,49.5 119.55,38.5 ; 167.05,38.5 179.25,38.5 179.25,49.5 167.05,49.5 167.05,38.5 ; 208.5,57 208.5,79 232,79 232,57 208.5,57 ; 217.5,22.5 217.5,49.5 223.5,49.5 223.5,22.5 217.5,22.5 ; 238.55,38.5 250.75,38.5 250.75,49.5 238.55,49.5 238.55,38.5 ; 286.05,38.5 298.25,38.5 298.25,49.5 286.05,49.5 286.05,38.5

## Other copper
Top Layer:
  region net NetPV601_2: 54.49,69.95 49.39,69.95 49.39,17.86 54.49,17.86
  region net NetPV605_2: 285.49,69.95 280.39,69.95 280.39,17.86 285.49,17.86
  region net V-: 93.7,19.45 91.3,19.45 91.3,2.55 93.7,2.55
  region net V-: 237.99,71.95 232.89,71.95 232.89,2.3 237.99,2.3
  region net V-: 118.99,71.95 113.89,71.95 113.89,1.1 118.99,1.1
  region net V-: 6.99,70.5 1.89,70.5 1.89,1.3 6.99,1.3
  region net NetPV603_2: 166.49,69.95 161.39,69.95 161.39,17.86 166.49,17.86
Bottom Layer:
  rectangle net V-: 91.3,17.65 93.7,20.75
  rectangle net V_out: 88.35,19.05 90.75,20.65
  region net VIN6: 106.35,67.1 105.55,67.1 105.55,64.9 106.35,64.9
  region net NetOP301_5: 107.2,64.6 103.65,64.6 103.65,63.6 107.2,63.6

## Silkscreen, mask and mechanical layers (free items; w line width, h text height)
Top Overlay:
  drawing of 3105 lines, arcs and shapes, not listed
  text "ANTIRAM" at 0.735,41 h2 r270
  text "RAM" at 325.58,13.92 h2 r270
  text "Nicholas J. Sorensen, Erik F. Halliwell" at 44.35,8.1 h2 r180
  text "'.Print_Date'  V1.04 SVN 2699" at 44.391,5.259 h2 r180
  text "HYPERION: PORT DEPLOYABLE" at 44.218,3.247 h3 r180
  text "ZENITH" at 158,1.1 h2
Bottom Overlay:
  text "Test Points: / TP101-VIN0 / TP102-VIN1 / TP103-VIN2 / TP104-VIN3 / TP105-VIN4 / TP106-VIN5 / TP107-VIN6 / TP108-VIN7" at 101.2,70.7 h0.7
  text "ANTIRAM" at 0.735,31.4 h2 r270
  text "GND" at 96.67,12.5 h0.7 r90
  text "VPortD+" at 89.32,12.4 h0.7 r90
  text "VPortD+" at 90.79,12.4 h0.7 r90
  text "VPortD-" at 92.26,12.4 h0.7 r90
  text "VPortD-" at 93.73,12.4 h0.7 r90
  text "3V3" at 95.2,12.4 h0.7 r90
  text "SPI_CLK" at 98.14,12.4 h0.7 r90
  text "SPI_MISO" at 99.61,12.4 h0.7 r90
  text "SPI_MOSI" at 101.08,12.4 h0.7 r90
  text "ADC_SPI_nCS_SD" at 102.55,12.4 h0.7 r90
  text "RAM" at 325.58,4.32 h2 r270
  text "ZENITH" at 167.6,1.1 h2
Mechanical 1:
  lines w0.254: 0,0 0,81 327.5,81 327.5,0 252.25,0 252.25,6 249.25,6 249.25,0 78.25,0 78.25,6 75.25,6 75.25,0 0,0 ; 7.55,38.5 7.55,49.5 19.75,49.5 19.75,38.5 7.55,38.5 ; 55.05,38.5 55.05,49.5 67.25,49.5 67.25,38.5 55.05,38.5 ; 102.5,22.5 108.5,22.5 108.5,49.5 102.5,49.5 102.5,22.5 ; 119.55,38.5 119.55,49.5 131.75,49.5 131.75,38.5 119.55,38.5 ; 167.05,38.5 167.05,49.5 179.25,49.5 179.25,38.5 167.05,38.5 ; 208.5,57 232,57 232,79 208.5,79 208.5,57 ; 217.5,22.5 223.5,22.5 223.5,49.5 217.5,49.5 217.5,22.5 ; 238.55,38.5 238.55,49.5 250.75,49.5 250.75,38.5 238.55,38.5 ; 286.05,38.5 286.05,49.5 298.25,49.5 298.25,38.5 286.05,38.5
Top Assembly:
  lines w0.254: 102.5,22.5 108.5,22.5 108.5,49.5 102.5,49.5 102.5,22.5 ; 217.5,22.5 223.5,22.5 223.5,49.5 217.5,49.5 217.5,22.5

## Text inside footprints (layer, text, board x,y; h text height)
PV601: Top Overlay "-" at 51.5,26.855 h0.7 r90; Top Overlay "-" at 51.5,47.556 h0.7 r90; Top Overlay "-" at 51.472,61.094 h0.7 r90; Top Overlay "+" at 76.135,26.22 h0.7 r90; Top Overlay "+" at 76.135,48.445 h0.7 r90; Top Overlay "+" at 76.135,70.67 h0.7 r90
PV602: Top Overlay "-" at 4,26.855 h0.7 r90; Top Overlay "-" at 4,47.556 h0.7 r90; Top Overlay "-" at 3.972,61.094 h0.7 r90; Top Overlay "+" at 28.635,26.22 h0.7 r90; Top Overlay "+" at 28.635,48.445 h0.7 r90; Top Overlay "+" at 28.635,70.67 h0.7 r90
PV603: Top Overlay "-" at 163.5,26.855 h0.7 r90; Top Overlay "-" at 163.5,47.556 h0.7 r90; Top Overlay "-" at 163.472,61.094 h0.7 r90; Top Overlay "+" at 188.135,26.22 h0.7 r90; Top Overlay "+" at 188.135,48.445 h0.7 r90; Top Overlay "+" at 188.135,70.67 h0.7 r90
PV604: Top Overlay "-" at 116,26.855 h0.7 r90; Top Overlay "-" at 116,47.556 h0.7 r90; Top Overlay "-" at 115.972,61.094 h0.7 r90; Top Overlay "+" at 140.635,26.22 h0.7 r90; Top Overlay "+" at 140.635,48.445 h0.7 r90; Top Overlay "+" at 140.635,70.67 h0.7 r90
PV605: Top Overlay "+" at 307.135,70.67 h0.7 r90; Top Overlay "+" at 307.135,48.445 h0.7 r90; Top Overlay "+" at 307.135,26.22 h0.7 r90; Top Overlay "-" at 282.472,61.094 h0.7 r90; Top Overlay "-" at 282.5,47.556 h0.7 r90; Top Overlay "-" at 282.5,26.855 h0.7 r90
PV606: Top Overlay "-" at 235,26.855 h0.7 r90; Top Overlay "-" at 235,47.556 h0.7 r90; Top Overlay "-" at 234.972,61.094 h0.7 r90; Top Overlay "+" at 259.635,26.22 h0.7 r90; Top Overlay "+" at 259.635,48.445 h0.7 r90; Top Overlay "+" at 259.635,70.67 h0.7 r90